# EAGLE board sparkfun-nrf52832-breakout (EAGLE 8.2.2)
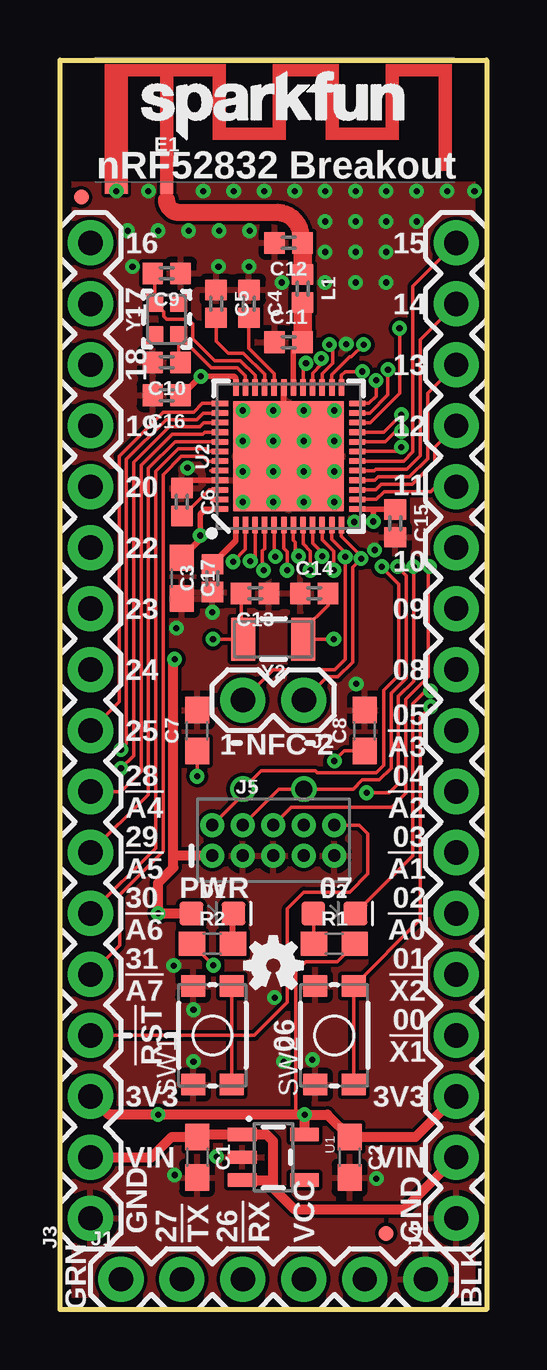
[diagram p0: board, top side]
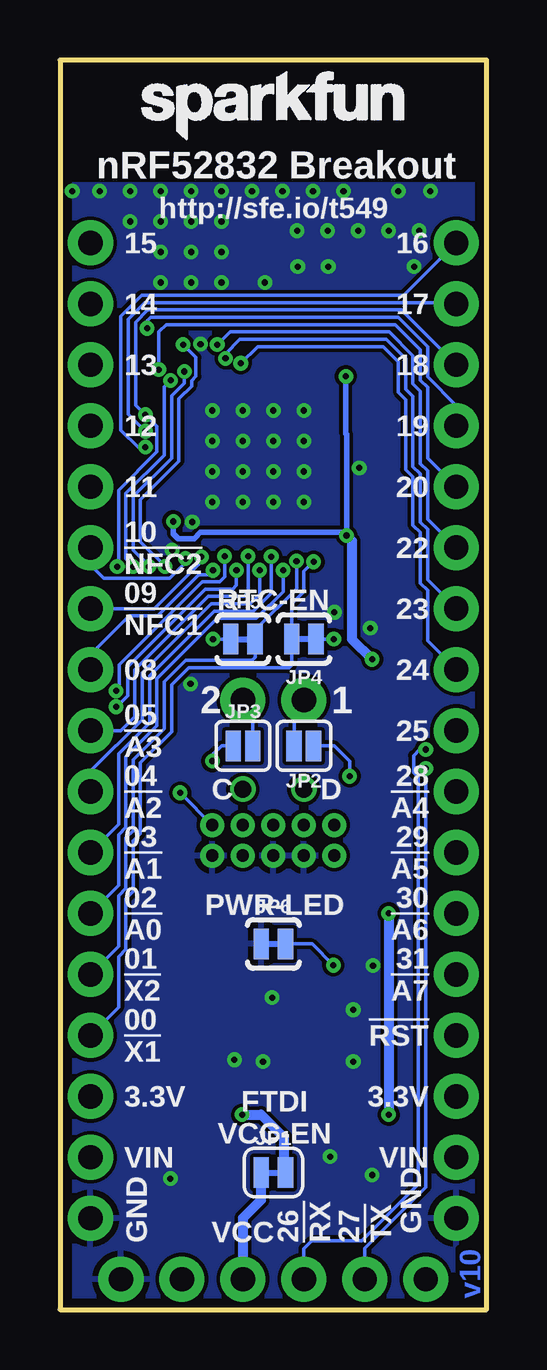
[diagram p1: board, bottom side, seen from below]

Size 17.78 x 52.07 mm. Coordinates in mm from the lower left corner, seen from the top.
Outline: 0,0 0,52.07 17.78,52.07 17.78,0 0,0
Copper layers (1*16): Top 0.0356mm / dielectric 1.5011mm / Bottom 0.0356mm
Design rules "LaenPCBOrder": minimum track width 6mil, minimum drill 13mil, track to track 6mil, track to pad 6mil, pad to pad 6mil, via to via 6mil, smd to smd 6mil, copper to edge 15mil, drill to drill 6mil, minimum pad ring 7mil, minimum via ring 7mil, stop-mask expansion 3mil, vias tented up to drill 0mil, thermal gap 10mil
tRestrict: 2 lines

## Footprints (pad centres in the part's own frame; a part is rotated, then mirrored left to right if it is on the bottom)
0603 = smd 1.1 x 1: 1 -0.85,0; 2 0.85,0
0402 = smd 0.85 x 0.9: 1 -0.58,0; 2 0.58,0
LED-0603 = smd 1 x 1: A -0.877,0; C 0.877,0
TRACE_ANTENNA_2.4GHZ_15.2MM = smd 0.5 x 0.5: ANT 0,-0.25 | smd 0.9 x 0.5: GND -2.1,-0.25
FIDUCIAL-MICRO = smd 0.635 x 0.635: 1 0,0
1X06 = drill 1.016 pad 1.88: 1 0,0; 2 2.54,0; 3 5.08,0; 4 7.62,0; 5 10.16,0; 6 12.7,0
1X02 = drill 1.016 pad 1.88: 1 0,0; 2 2.54,0
1X17 = drill 1.016 pad 1.88: 1 0,0; 2 2.54,0; 3 5.08,0; 4 7.62,0; 5 10.16,0; 6 12.7,0; 7 15.24,0; 8 17.78,0; 9 20.32,0; 10 22.86,0; 11 25.4,0; 12 27.94,0; 13 30.48,0; 14 33.02,0; 15 35.56,0; 16 38.1,0; 17 40.64,0
2X5-PTH-1.27MM = drill 0.508 pad 1: 1 -2.54,-0.635; 2 -2.54,0.635; 3 -1.27,-0.635; 4 -1.27,0.635; 5 0,-0.635; 6 0,0.635; 7 1.27,-0.635; 8 1.27,0.635; 9 2.54,-0.635; 10 2.54,0.635
SMT-JUMPER_2_NC_TRACE_SILK = smd 0.635 x 1.27: 1 -0.508,0; 2 0.508,0
SMT-JUMPER_2_NO_SILK = smd 0.635 x 1.27: 1 -0.406,0; 2 0.406,0
PAD-JUMPER-2-NC_BY_TRACE_YES_SILK = smd 0.635 x 1.27: 1 -0.508,0; 2 0.508,0
TACTILE_SWITCH_SMD_4.6X2.8MM = smd 0.9 x 1: 1 -2.05,-0.8; 2 2.05,-0.8; 3 2.05,0.8; 4 -2.05,0.8
PAD.03X.04 = smd 1.016 x 1.016: P$1 0,0
SOT23-5 = smd 0.55 x 1.2: 1 -0.95,-1.3; 2 0,-1.3; 3 0.95,-1.3; 4 0.95,1.3; 5 -0.95,1.3
QFN48-6X6MM = smd 0.68 x 0.23: 1 -2.86,2.2; 2 -2.86,1.8; 3 -2.86,1.4; 4 -2.86,1; 5 -2.86,0.6; 6 -2.86,0.2; 7 -2.86,-0.2; 8 -2.86,-0.6; 9 -2.86,-1; 10 -2.86,-1.4; 11 -2.86,-1.8; 12 -2.86,-2.2; 25 2.86,-2.2; 26 2.86,-1.8; 27 2.86,-1.4; 28 2.86,-1; 29 2.86,-0.6; 30 2.86,-0.2; 31 2.86,0.2; 32 2.86,0.6; 33 2.86,1; 34 2.86,1.4; 35 2.86,1.8; 36 2.86,2.2 | smd 0.23 x 0.68: 13 -2.2,-2.86; 14 -1.8,-2.86; 15 -1.4,-2.86; 16 -1,-2.86; 17 -0.6,-2.86; 18 -0.2,-2.86; 19 0.2,-2.86; 20 0.6,-2.86; 21 1,-2.86; 22 1.4,-2.86; 23 1.8,-2.86; 24 2.2,-2.86; 37 2.2,2.86; 38 1.8,2.86; 39 1.4,2.86; 40 1,2.86; 41 0.6,2.86; 42 0.2,2.86; 43 -0.2,2.86; 44 -0.6,2.86; 45 -1,2.86; 46 -1.4,2.86; 47 -1.8,2.86; 48 -2.2,2.86 | smd 4.6 x 4.6: EP 0,0
CRYSTAL-SMD-2.0X1.6MM = smd 0.75 x 0.7: 1 -0.675,-0.5; 2 0.675,-0.5; 3 0.675,0.5; 4 -0.675,0.5
CRYSTAL-SMD-3.2X1.5MM = smd 1 x 1.8: P$1 -1.25,0; P$2 1.25,0

## Placement (x,y rotation side)
C1  1.0uF  [0603]  5.71,6.35 270 top
C2  2.2uF  [0603]  12.06,6.35 270 top
C3  0.1uF  [0402]  6.35,30.48 90 top
C4  DNP  [0402]  7.87,41.91 270 top
C5  100pF  [0402]  6.5,41.91 270 top
C6  1.0uF  [0402]  5.08,33.66 270 top
C7  180pF  [0603]  5.71,24.13 90 top
C8  180pF  [0603]  12.7,24.13 90 top
C9  6pF  [0402]  4.45,43.18 180 top
C10  6pF  [0402]  4.45,39.47 180 top
C11  0.8pF  [0402]  9.53,40.31 0 top
C12  DNP  [0402]  9.53,44.45 180 top
C13  15pF  [0402]  8.13,29.84 180 top
C14  15pF  [0402]  10.59,29.84 0 top
C15  0.1uF  [0402]  13.97,32.77 270 top
C16  0.1uF  [0402]  4.45,38.1 180 top
C17  4.7uF  [0603]  5.08,30.48 270 top
D1  RED  [LED-0603]  6.35,16.51 0 top
D2  BLUE  [LED-0603]  11.43,16.51 0 top
E1  ANT  [TRACE_ANTENNA_2.4GHZ_15.2MM]  4.45,46.99 0 top
FD1  FIDUCIALUFIDUCIAL  [FIDUCIAL-MICRO]  13.59,3.17 0 top
FD2  FIDUCIALUFIDUCIAL  [FIDUCIAL-MICRO]  0.89,46.35 0 top
FRAME1  FRAME-LETTER  [CREATIVE_COMMONS]  -10.16,-17.78 0 top  (outside the outline)
J1  [1X06]  2.54,1.27 0 top
J2  [1X02]  10.16,25.4 180 top
J3  [1X17]  1.27,3.81 90 top
J4  [1X17]  16.51,3.81 90 top
J5  CORTEX_DEBUGPTH  [2X5-PTH-1.27MM]  8.89,19.56 0 top
JP1  VDD-EN  [SMT-JUMPER_2_NC_TRACE_SILK]  8.89,5.71 0 bottom
JP2  NFC1  [SMT-JUMPER_2_NO_SILK]  7.62,23.5 180 bottom
JP3  NFC2  [SMT-JUMPER_2_NO_SILK]  10.16,23.5 0 bottom
JP4  XL1  [PAD-JUMPER-2-NC_BY_TRACE_YES_SILK]  7.62,27.94 180 bottom
JP5  XL2  [PAD-JUMPER-2-NC_BY_TRACE_YES_SILK]  10.16,27.94 0 bottom
JP6  PWR-LED  [PAD-JUMPER-2-NC_BY_TRACE_YES_SILK]  8.89,15.24 0 bottom
L1  3.9nH  [0402]  10.11,42.55 270 top
LOGO1  OSHW-LOGOMINI  [OSHW-LOGO-MINI]  8.89,14.35 0 top
LOGO2  SFE_LOGO_NAME.1_INCH  [SFE_LOGO_NAME_.1]  2.92,48.26 0 top
LOGO3  SFE_LOGO_NAME.1_INCH  [SFE_LOGO_NAME_.1]  14.86,48.26 0 bottom
R1  1k  [0603]  11.43,15.24 0 top
R2  1k  [0603]  6.35,15.24 0 top
SW1  TACTILE_SWITCH_SMD_4_6X2_8MM  [TACTILE_SWITCH_SMD_4.6X2.8MM]  6.35,11.43 90 top
SW2  TACTILE_SWITCH_SMD_4_6X2_8MM  [TACTILE_SWITCH_SMD_4.6X2.8MM]  11.43,11.43 90 top
TP1  TEST-POINT3X4  [PAD.03X.04]  7.62,21.69 0 bottom
TP2  TEST-POINT3X4  [PAD.03X.04]  10.16,21.69 0 bottom
U1  AP2112K-3.3V  [SOT23-5]  8.89,6.35 270 top
U2  NRF52832  [QFN48-6X6MM]  9.53,35.56 90 top
Y1  32MHz  [CRYSTAL-SMD-2.0X1.6MM]  4.45,41.27 90 top
Y2  32.768kHz  [CRYSTAL-SMD-3.2X1.5MM]  8.89,27.94 180 top

## Library data of the parts
C1 = SparkFun-Capacitors; PROD_ID: CAP-00868
C2 = SparkFun-Capacitors; PROD_ID: CAP-07888
C3 C15 C16 = SparkFun-Capacitors; PROD_ID: CAP-12416
C4 C12 = SparkFun-Passives
C5 = nrf52832-breakout-temp; PROD_ID: CAP-13458
C6 = SparkFun-Capacitors; PROD_ID: CAP-12417
C7 C8 = nrf52832-breakout-temp; PROD_ID: CAP-11661
C9 C10 = nrf52832-breakout-temp; PROD_ID: CAP-13455
C11 = nrf52832-breakout-temp; PROD_ID: CAP-13456
C13 C14 = SparkFun-Capacitors; PROD_ID: CAP-13063
C17 = SparkFun-Capacitors; PROD_ID: CAP-08280
D1 = SparkFun-LED; PROD_ID: DIO-00819
D2 = SparkFun-LED; PROD_ID: DIO-08575
E1 = SparkFun-RF
FD1 FD2 FRAME1 LOGO1-LOGO3 = SparkFun-Aesthetics
J1-J5 TP1 TP2 = SparkFun-Connectors
JP1-JP6 = SparkFun-Jumpers
L1 = nrf52832-breakout-temp; PROD_ID: NDUC-13457
R1 R2 = SparkFun-Resistors; PROD_ID: RES-07856
SW1 SW2 = SparkFun-Electromechanical; PROD_ID: SWCH-13065
U1 = SparkFun-PowerIC; PROD_ID: VREG-12457
U2 = nrf52832-breakout-temp; PROD_ID: IC-13460
Y1 = nrf52832-breakout-temp; PROD_ID: XTAL-13459
Y2 = SparkFun-Clocks; PROD_ID: XTAL-13062

## Nets
!RESET!: J3.4 J5.10 SW1.1 SW1.2 U2.24
ANT: C11.2 L1.2 U2.30
DCC: U2.47
DEC1: C3.2 U2.1
DEC2: C4.2 U2.32
DEC3: C5.2 U2.33
DEC4: C6.2 U2.46
GND: C1.2 C2.2 C3.1 C4.1 C5.1 C6.1 C7.2 C8.2 C9.1 C10.2 C11.1 C12.2 C13.1 C14.1 C15.2 C16.2 C17.2 E1.GND J1.6 J3.1 J4.1 J5.3 J5.5 J5.9 JP6.1 SW1.3 SW1.4 SW2.3 SW2.4 U1.2 U2.31 U2.45 U2.EP
N$1: JP6.2 R2.1
N$3: C13.2 JP4.1 Y2.P$2
N$4: C14.2 JP5.1 Y2.P$1
N$11: C12.1 E1.ANT L1.1
N$12: D1.C R2.2
N$14: J1.4 JP1.1
N$15: D2.A R1.1
NC: U2.44
NFC1: C7.1 JP2.1
NFC2: C8.1 JP3.1
P00: J4.4 JP4.2 U2.2
P01: J4.5 JP5.2 U2.3
P02: J4.6 U2.4
P03: J4.7 U2.5
P04: J4.8 U2.6
P05: J4.9 U2.7
P06: SW2.1 SW2.2 U2.8
P07: D2.C U2.9
P08: J4.10 U2.10
P09: J2.2 J4.11 JP2.2 U2.11
P10: J2.1 J4.12 JP3.2 U2.12
P11: J4.13 U2.14
P12: J4.14 U2.15
P13: J4.15 U2.16
P14: J4.16 U2.17
P15: J4.17 U2.18
P16: J3.17 U2.19
P17: J3.16 U2.20
P18: J3.15 J5.6 U2.21
P19: J3.14 U2.22
P20: J3.13 U2.23
P22: J3.12 U2.27
P23: J3.11 U2.28
P24: J3.10 U2.29
P25: J3.9 U2.37
P26: J1.3 U2.38
P27: J1.2 U2.39
P28: J3.8 U2.40
P29: J3.7 U2.41
P30: J3.6 U2.42
P31: J3.5 U2.43
SWDCLK: J5.4 TP2.P$1 U2.25
SWDIO: J5.2 TP1.P$1 U2.26
VDD: C2.1 C15.1 C16.1 C17.1 D1.A J3.3 J4.3 J5.1 JP1.2 R1.2 U1.5 U2.13 U2.36 U2.48
VIN: C1.1 J3.2 J4.2 U1.1 U1.3
XC1: C9.2 U2.34 Y1.3
XC2: C10.1 U2.35 Y1.1

## Tracks (layer width: path | path; a pad name or v marks a point on that pad's centre or on a via)
!RESET!  (via drill 0.25)
  Top 0.152: U2.24 12.87,37.76 13.17,38.06 v13.17,38.72 | SW1.1 7.15,11.43 | 7.15,11.43 SW1.2 | J3.4 7.15,11.43 | 7.15,11.43 8.1,11.43 9.47,12.8 9.47,16.71 10.16,17.4 12.06,17.4 12.83,18.16 12.83,19.84 12.47,20.19 J5.10 | v14.73,30.96 14.73,26.19 14.1,25.55 14.1,21.92 13.72,21.54 v12.78,21.54
  Bottom 0.152: v13.17,38.72 13.44,38.46 13.44,35.61 15.04,34.01 15.04,31.29 14.73,30.99 v14.73,30.96 | J5.10 v12.78,21.54
ANT
  Top 0.229: U2.30 9.72,39.93 C11.2
  Top 0.762: C11.2 L1.2
DCC
  Top 0.152: U2.47 6.27,33.76
DEC1
  Top 0.229: U2.1 7.33,32.03 C3.2
DEC2
  Top 0.152: U2.32 8.93,39.01 7.87,40.06 C4.2
DEC3
  Top 0.152: U2.33 8.53,38.97 7.64,39.85 7.01,39.85 6.5,40.36 C5.2
DEC4
  Top 0.152: C6.2 5.13,33.08 6.22,34.16 U2.46
GND  (via drill 0.25)
  Top 0.152: 9.32,35.76 v8.89,36.2
  Top 0.229: U2.31 9.32,35.76 U2.EP | C16.2 3.81,38.1 | U2.45 5.41,34.56 C6.1
  other vias: 2.35,46.61 3.02,43.46 6.6,43.46 7.87,43.46 9.25,42.8 11.05,42.8 6.35,29.06 12.27,32.82 13.11,31.65 10.16,34.92 10.16,33.66 10.16,36.2 10.16,37.47 8.89,37.47 8.89,34.92 8.89,33.66 7.62,33.66 7.62,34.92 7.62,36.2 7.62,37.47 11.43,37.47 11.43,36.2 11.43,34.92 11.43,33.66 5.31,35.08 11.93,40.23 4.85,28.4 4.78,5.61 6.53,6.38 10.52,10.41 5.56,10.34 4.74,14.34 5.56,12.5 12.34,26.07 13.18,5.46 11.05,44.07 11.05,45.34 11.05,46.61 9.78,46.61 8.51,46.61 7.24,46.61 5.97,46.61 7.9,44.96 6.63,44.96 5.36,44.96 3.68,46.61 12.32,42.8 12.32,44.07 12.32,45.34 12.32,46.61 13.59,46.61 14.86,46.61 16.13,46.61 17.27,46.61 4.09,44.96 2.82,44.96 13.59,42.8 13.59,44.07 13.59,45.34 14.86,45.34 9.32,10.34 8.94,13
  pour Top (isolate 0.152): 17.78,46.86 0,46.86 0,0 17.78,0
  pour Bottom (isolate 0.152): 17.78,46.86 0,46.86 0,0 17.78,0
N$1  (via drill 0.25)
  Top 0.152: R2.1 v6.39,14.35
  Bottom 0.152: v6.39,14.35 7.28,15.24 JP6.2
N$3  (via drill 0.25)
  Top 0.152: v6.38,27.94 Y2.P$2 7.55,28.03 C13.2
  Bottom 0.152: JP4.1 v6.38,27.94
N$4  (via drill 0.25)
  Top 0.152: C14.2 11.17,29.36 10.14,28.33 10.53,27.94 | 10.53,27.94 v11.4,27.94 | 10.53,27.94 Y2.P$1
  Bottom 0.152: JP5.1 v11.4,27.94
N$11
  Top 0.508: E1.ANT 4.45,46.23
  Top 0.711: 4.45,46.23 arc90 4.95,45.72 9.02,45.72 arc-90 10.05,44.69 10.05,44.45 C12.1
  Top 0.762: L1.1 C12.1
N$12
  Top 0.254: R2.2 7.2,16.48 D1.C
N$14
  Bottom 0.406: J1.4 10.16,3.81 9.4,4.57 JP1.1
N$15
  Top 0.152: R1.1 10.58,16.48 D2.A
NC
  Top 0.152: U2.44 6.27,34.96
NFC1  (via drill 0.25)
  Top 0.152: 5.94,23.44 5.78,23.28 C7.1 v5.71,22.23
  Bottom 0.152: v5.71,22.23 5.71,22.86 6.35,23.5 JP2.1
NFC2  (via drill 0.25)
  Top 0.152: C8.1 11.85,23.28 v11.43,22.86
  Bottom 0.152: JP3.1 11.05,23.5 11.43,23.11 v11.43,22.86
P00  (via drill 0.25)
  Top 0.152: U2.2 7.72,31.68 v7.21,31.17
  Bottom 0.152: v7.21,31.17 7.62,30.76 7.62,29.92 8.13,29.41 JP4.2 | JP4.2 8.2,27.94 | JP4.2 8.13,26.85 8.23,26.75 12.42,26.75 13.13,26.04 13.13,24.08 14.43,22.78 14.43,19.84 14.73,19.53 14.73,17.42 15.04,17.12 15.04,15.01 15.34,14.71 15.34,12.6 J4.4
P01  (via drill 0.25)
  Top 0.152: U2.3 8.12,31.39 v7.92,31.19
  Bottom 0.152: v7.92,31.19 7.92,30.05 9.65,28.32 JP5.2 9.65,27.18 9.78,27.05 12.55,27.05 13.44,26.16 13.44,24.21 14.73,22.91 14.73,19.96 15.04,19.66 15.04,17.55 15.34,17.25 15.34,15.14 J4.5
P02  (via drill 0.25)
  Top 0.152: U2.4 8.53,31.71 8.43,31.62 8.43,30.86 v8.48,30.81
  Bottom 0.152: v8.48,30.81 8.48,29.92 9.6,28.8 11.23,28.8 13.74,26.29 13.74,24.33 15.04,23.04 15.04,20.09 15.34,19.79 15.34,17.68 J4.6
P03  (via drill 0.25)
  Top 0.152: U2.5 8.93,31.43 v8.98,31.38
  Bottom 0.152: v8.98,31.38 8.98,29.86 9.73,29.11 11.35,29.11 14.05,26.42 14.05,24.46 15.34,23.16 15.34,20.22 J4.7
P04  (via drill 0.25)
  Top 0.152: U2.6 9.32,31.72 9.46,31.59 v9.46,30.81
  Bottom 0.152: v9.46,30.81 9.46,29.81 9.86,29.41 11.48,29.41 14.35,26.54 14.35,24.59 16.51,22.43 J4.8
P05  (via drill 0.25)
  Top 0.152: U2.7 9.72,32.06 9.8,31.98 9.8,31.53 v9.94,31.39
  Bottom 0.152: v9.94,31.39 9.94,29.88 10.11,29.72 11.61,29.72 14.66,26.67 14.66,24.71 15.24,24.13 J4.9
P06  (via drill 0.25)
  Top 0.152: U2.8 10.12,31.91 10.43,31.61 v10.43,30.81 | v15.44,25.12 15.01,24.69 15.01,16.26 SW2.2 SW2.1
  Bottom 0.152: v10.43,30.81 10.43,30.19 10.59,30.02 11.73,30.02 14.96,26.8 14.96,25.58 15.42,25.12 v15.44,25.12
P07  (via drill 0.25)
  Top 0.152: U2.9 10.53,31.94 10.92,31.55 v10.92,31.39 | v15.44,25.78 15.24,25.78 14.71,25.25 14.71,18.91 D2.C
  Bottom 0.152: v10.92,31.39 10.92,30.53 11.12,30.33 11.86,30.33 15.32,26.87 15.32,25.91 v15.44,25.78
P08  (via drill 0.25)
  Top 0.152: U2.10 10.93,32.08 11.4,31.6 v11.4,30.81
  Bottom 0.152: v11.4,30.81 11.58,30.63 11.99,30.63 13.72,28.91 14.88,28.91 16.51,27.28 J4.10
P09  (via drill 0.25)
  Top 0.152: U2.11 11.32,32.11 11.89,31.55 v11.89,31.37 11.89,27.1 11.46,26.67 8.89,26.67 J2.2
  Bottom 0.152: v11.89,31.37 11.89,31.17 13.84,29.21 J4.11 | JP2.2 8.03,24.99 J2.2
P10  (via drill 0.25)
  Top 0.152: U2.12 11.72,32.22 12.55,31.39 v12.55,31.29 12.19,30.94 12.19,26.98 11.58,26.36 11.12,26.36 J2.1
  Bottom 0.152: 16.51,31.62 J4.12 16.51,31.04 15.95,30.48 13.21,30.48 12.55,31.14 v12.55,31.29 | JP3.2 9.75,24.99 J2.1
P11
  Top 0.152: U2.14 13.19,33.76 13.51,34.09 15.44,34.09 15.65,34.29 J4.13
P12
  Top 0.152: U2.15 13.15,34.16 13.39,34.39 14.68,34.39 15.62,35.33 15.62,35.94 J4.14
P13
  Top 0.152: U2.16 13.12,34.56 13.26,34.7 14.55,34.7 15.32,35.46 15.32,38.18 J4.15
P14
  Top 0.152: U2.17 13.09,34.96 13.16,35.03 14.45,35.03 15.01,35.59 15.01,40.41 J4.16
P15
  Top 0.152: J4.17 14.71,42.65 14.71,35.74 14.33,35.36 U2.18
P16  (via drill 0.25)
  Top 0.152: U2.19 14.04,35.76 v14.22,35.94
  Bottom 0.152: J3.17 3.45,42.27 14.38,42.27 15.24,41.4 15.24,36.65 14.53,35.94 v14.22,35.94
P17  (via drill 0.25)
  Top 0.152: U2.20 13.55,36.16 13.99,36.6 v14.22,36.6
  Bottom 0.152: J3.16 1.32,41.96 14.25,41.96 14.94,41.27 14.94,37.31 v14.22,36.6
P18  (via drill 0.25)
  Top 0.152: U2.21 13.5,36.56 v14.22,37.29 | v15.39,30.96 15.34,30.91 15.34,26.36 14.4,25.43 14.4,21.51 13.82,20.93 9.63,20.93 J5.6
  Bottom 0.152: J3.15 3.56,41.66 14.12,41.66 14.63,41.15 14.63,37.69 v14.22,37.29 13.74,36.8 13.74,35.74 15.34,34.14 15.34,31.01 v15.39,30.96
P19  (via drill 0.25)
  Top 0.152: U2.22 12.93,36.96 14.15,38.18 v14.15,40.89
  Bottom 0.152: v14.15,40.89 14.15,41.2 13.99,41.35 3.68,41.35 2.46,40.13 2.46,38.86 1.27,37.67 J3.14
P20  (via drill 0.25)
  Top 0.152: U2.23 12.9,37.36 13.66,38.12 v13.66,39.17
  Bottom 0.152: v13.66,39.17 13.66,40.74 13.36,41.05 3.81,41.05 2.77,40.01 2.77,38.73 2.46,38.43 2.46,35.48 J3.13
P22  (via drill 0.25)
  Top 0.152: U2.27 10.93,38.99 11.37,39.43 11.37,40.07 v11.23,40.21
  Bottom 0.152: 11.18,40.26 v11.23,40.21 10.69,40.74 4.06,40.74 3.07,39.75 3.07,38.58 2.77,38.28 2.77,35.26 2.46,34.95 2.46,32.94 J3.12
P23  (via drill 0.25)
  Top 0.152: U2.28 10.53,39.02 10.88,39.38 v10.88,39.64
  Bottom 0.152: J3.11 2.46,30.4 2.46,32.51 2.77,32.82 2.77,34.82 3.07,35.13 3.07,38.05 3.38,38.35 3.38,39.62 4.19,40.44 10.29,40.44 10.88,39.84 v10.88,39.64
P24  (via drill 0.25)
  Top 0.152: U2.29 10.12,39.31 v10.25,39.43
  Bottom 0.152: J3.10 2.46,27.86 2.46,29.97 2.77,30.28 2.77,32.38 3.07,32.69 3.07,34.7 3.38,35 3.38,37.92 3.68,38.23 3.68,39.5 4.32,40.13 9.55,40.13 v10.25,39.43
P25
  Top 0.152: U2.37 5.93,37.76 5.56,37.39 4.29,37.39 2.46,35.56 2.46,25.32 J3.9
P26  (via drill 0.25)
  Top 0.152: U2.38 5.97,37.36 5.69,37.08 4.42,37.08 2.77,35.43 2.77,23.57 v2.54,23.34
  Bottom 0.152: v2.54,23.34 2.79,23.34 3.05,23.09 3.05,22.38 2.85,22.17 2.85,5.23 5.21,2.87 7.29,2.87 7.62,2.54 J1.3
P27  (via drill 0.25)
  Top 0.152: U2.39 6,36.96 5.82,36.78 4.55,36.78 3.07,35.31 3.07,23.09 v2.54,22.55
  Bottom 0.152: v2.54,22.55 2.54,5.11 5.08,2.56 J1.2
P28
  Top 0.152: U2.40 6.03,36.56 5.94,36.47 4.67,36.47 3.38,35.18 3.38,22.43 2.54,21.59 J3.8
P29
  Top 0.152: U2.41 6.66,36.17 4.8,36.17 3.68,35.05 3.68,21.46 J3.7
P30
  Top 0.152: U2.42 6.17,35.76 6.07,35.87 4.93,35.87 3.99,34.92 3.99,19.23 J3.6
P31
  Top 0.152: 6.66,35.36 U2.43 6.15,35.36 5.94,35.56 5.05,35.56 4.29,34.8 4.29,19.1 2.49,17.3 2.49,15.19 J3.5
SWDCLK  (via drill 0.25, 0.71)
  Top 0.152: U2.25 11.72,38.93 11.89,39.09 v12.6,39.09 | v14.07,30.96 14.07,30.94 14.43,30.58 14.43,26.31 13.79,25.68 13.79,22.55 13.31,22.07 12.6,22.07 12.22,21.69 TP2.P$1 9.12,21.69 J5.4
  Bottom 0.152: v12.6,39.09 12.6,38.61 13.13,38.08 13.13,35.48 14.73,33.88 14.73,31.65 14.07,30.99 v14.07,30.96
  other vias: 10.16,21.69
SWDIO  (via drill 0.25, 0.71)
  Top 0.152: U2.26 11.32,38.96 12.06,39.7 12.14,39.7 v12.65,40.21 | v13.41,30.96 13.41,30.94 14.12,30.23 14.12,26.44 13.49,25.81 13.49,22.68 13.18,22.38 10.72,22.38 10.64,22.45 8.38,22.45 TP1.P$1 7.62,21.46 J5.2
  Bottom 0.152: v12.65,40.21 12.12,39.67 12.12,38.89 12.29,38.71 12.29,38.48 12.83,37.95 12.83,35.36 14.43,33.76 14.43,32 13.41,30.99 v13.41,30.96 | TP1.P$1 7.62,21.46
  other vias: 7.62,21.69
VDD  (via drill 0.25)
  Top 0.152: R1.2 11.54,14.5 10.24,14.5 9.83,14.1 9.83,8.13
  Top 0.229: U2.36 7.33,38.8 7.24,38.89 v5.87,38.89 5.08,38.1 C16.1 | U2.13 13.06,33.36 | 13.06,33.36 13.96,33.36 C15.1 | U2.48 6.05,33.36 5.84,33.15 v5.84,32.26 5.84,32.09 C17.1 | v13.06,32.84 13.06,33.36
  Top 0.406: J4.3 14.82,7.2 C2.1 11.14,8.13 v10.19,8.13 | J3.3 2.03,8.13 v4.09,8.13 9.83,8.13 v10.19,8.13 | U1.5 v10.19,8.13 | 4.72,18.92 4.72,18.41 4.09,17.78 v4.09,16.51 D1.A | 4.72,18.92 4.72,27.05 v4.78,27.1 | J5.1 4.72,18.92
  Bottom 0.229: v13.06,32.84 13.06,32.33 12.85,32.13 12.19,32.13 11.94,32.38 5.97,32.38 5.87,32.28 v5.84,32.26 5.84,36.47 5.87,36.5 v5.87,38.89
  Bottom 0.406: v4.09,16.51 v4.09,8.13 | 5.87,32.28 5.61,32.03 5.61,27.94 v4.78,27.1 | v10.19,8.13 9.4,8.13 8.44,7.17 8.44,5.77 JP1.2
VIN
  Top 0.406: 8.87,5.4 8.87,7.04 8.6,7.3 U1.1 5.82,7.3 C1.1 4.66,7.2 3.81,6.35 J3.2 | 8.87,5.4 8.87,5.08 9.75,4.19 14.35,4.19 J4.2 | U1.3 8.87,5.4
XC1
  Top 0.152: U2.34 8.12,38.94 7.52,39.55 6.45,39.55 5.54,40.46 5.54,41.07 5.33,41.27 4.45,41.27 4.32,41.4 4.32,41.58 Y1.3 3.94,43.1 C9.2
XC2
  Top 0.152: U2.35 7.72,38.91 7.39,39.24 6.3,39.24 Y1.1 4.95,39.47 C10.1

## Text on the board
Bottom: v10
tPlace: nRF52832 Breakout | 16 | 15 | 17 | 14 | 18 | 13 | 19 | 12 | 20 | 11 | 22 | 10 | 23 | 09 | 24 | 08 | 25 | 1 | NFC | 2 | 05 / !A3 | 28 / !A4 | 04 / !A2 | 29 / !A5 | 03 / !A1 | 30 / !A6 | PWR | 07 | 02 / !A0 | 31 / !A7 | 01 / !X2 | !RST! | 06 | 00 / !X1 | 3V3 | 3V3 | VIN | VIN | GND | 27 / !TX | 26 / !RX | VCC | GND | GRN | BLK
bPlace: nRF52832 Breakout | http://sfe.io/t549 | 16 | 15 | 17 | 14 | 18 | 13 | 19 | 12 | 20 | 11 | 22 | 10 / !NFC2 | 23 | RTC-EN | 09 / !NFC1 | 24 | 08 | 1 | 2 | 25 | 05 / !A3 | 28 / !A4 | D | C | 04 / !A2 | 29 / !A5 | 03 / !A1 | 30 / !A6 | 02 / !A0 | PWR-LED | 31 / !A7 | 01 / !X2 | !RST! | 00 / !X1 | 3.3V | 3.3V | FTDI / VCC-EN | VIN | VIN | GND | 27 / !TX | 26 / !RX | VCC | GND
Measures: Units in inches
tDocu: Jim Lindblom